# Altium PCB EMG_MainBoard_Layout.PcbDoc (part 6 of 6)
Units mm, origin at the board's own origin, x right, y up, seen from the top; angles counter-clockwise.
Board outline 75 x 40 mm, 4 copper layers (L1 TOP, L2 GND, L3 POWER SIGNAL, L4 BOTTOM GND), stack 1.164 mm thick; 231 components, 136 nets, 808 pads, 80 vias.
Unrouted connection lines stored in the file: 570.
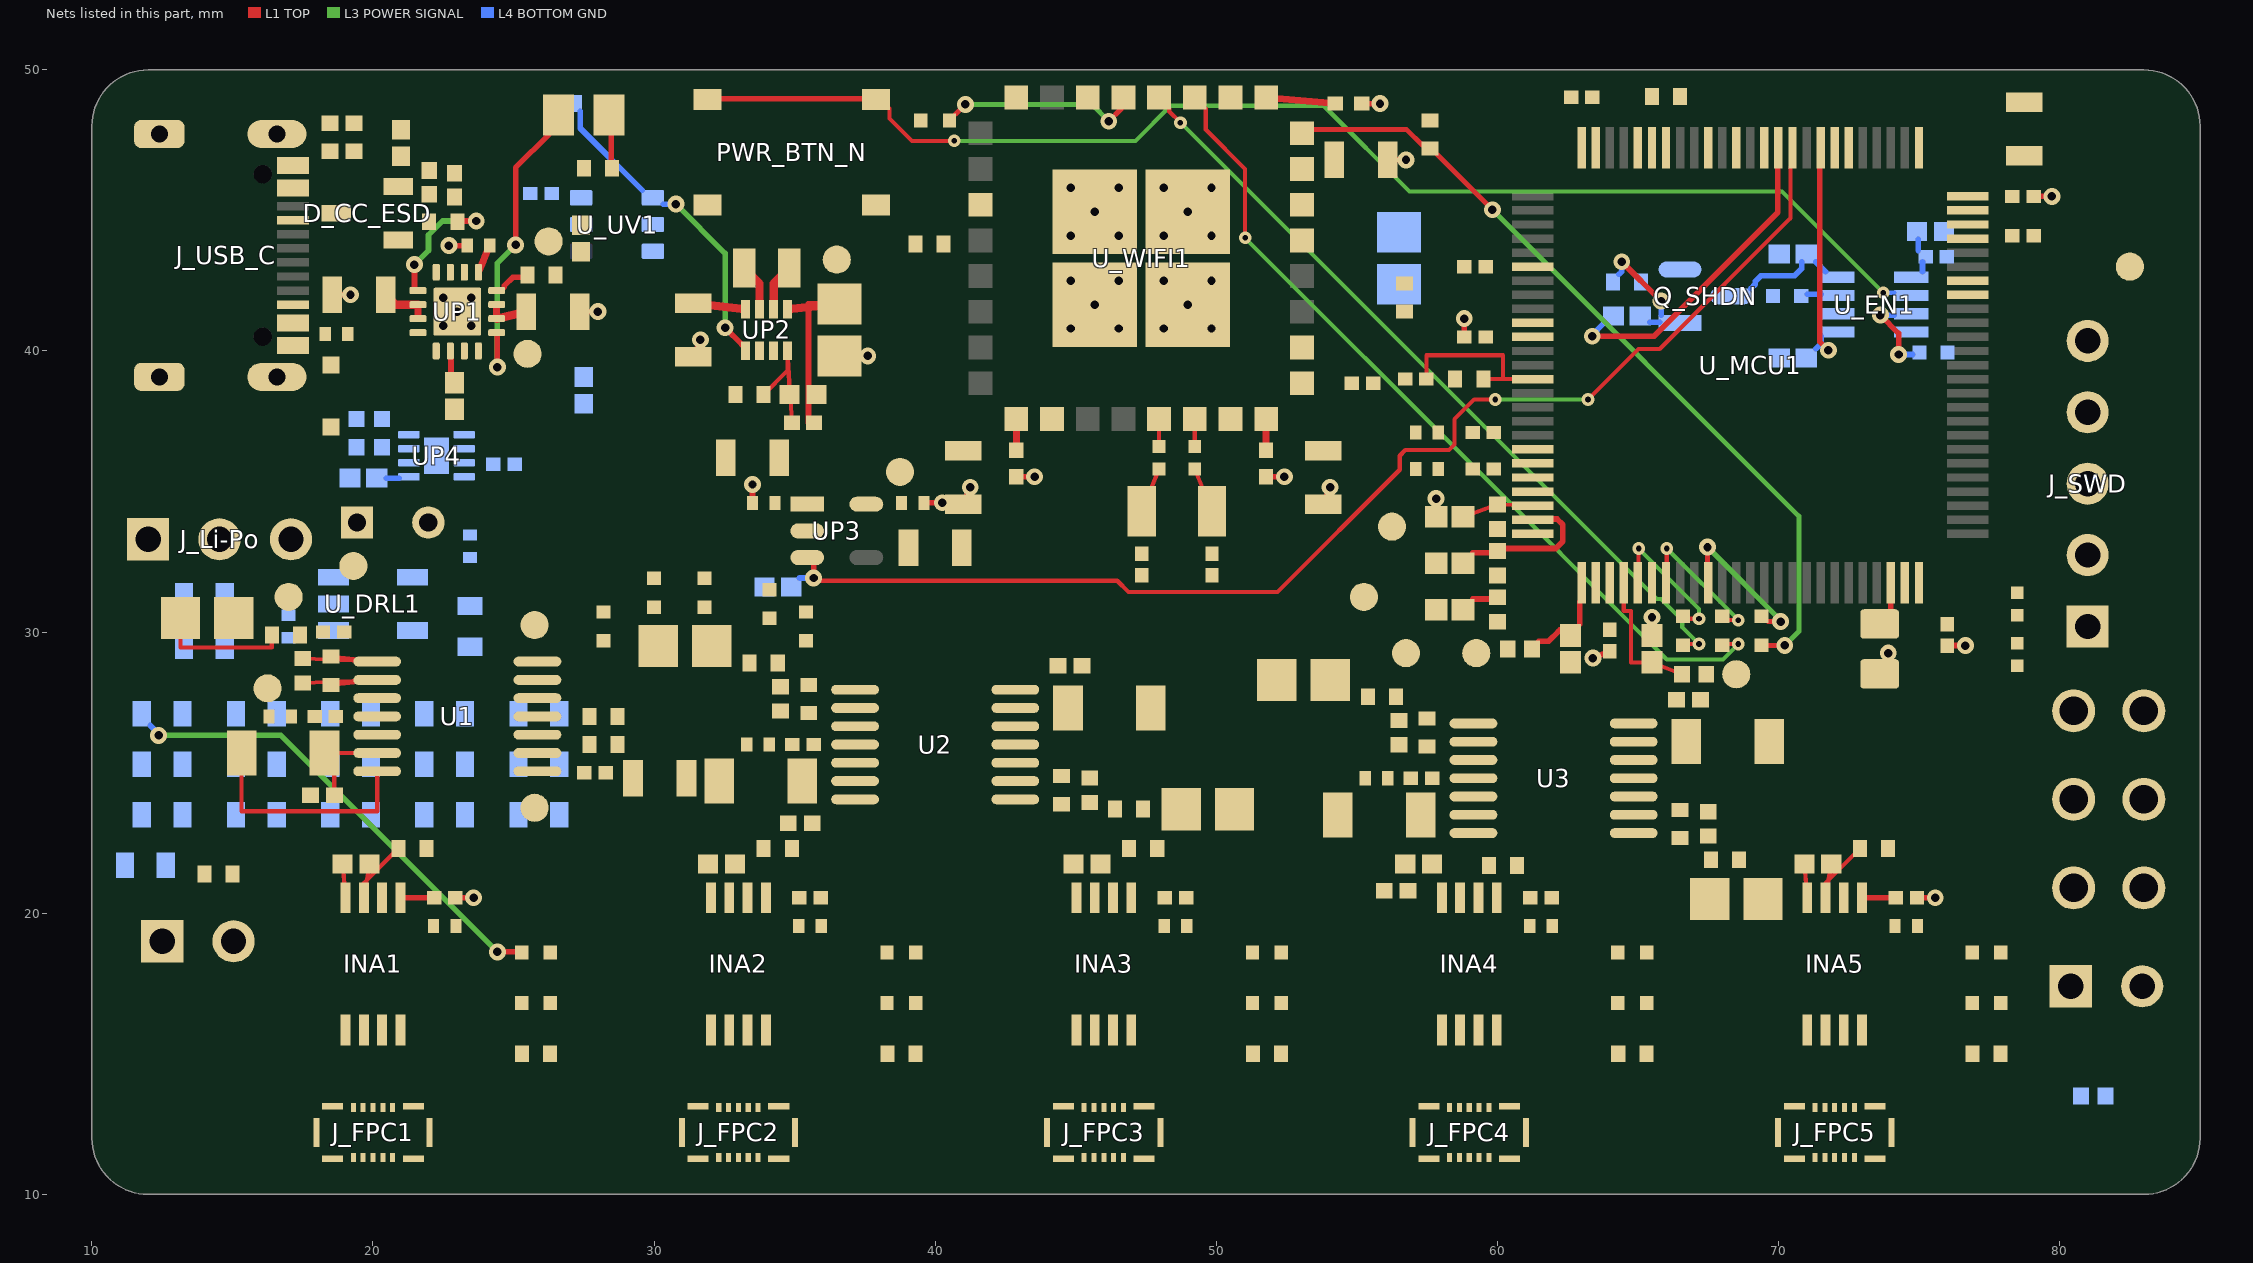
[diagram p5: the nets of this part, all layers, seen from the top]

## Via types
v1: diameter 0.6, hole 0.3, L1 TOP to L4 BOTTOM GND, 52 vias
v2: diameter 0.45, hole 0.2, L1 TOP to L4 BOTTOM GND, 12 vias
v3: diameter 0.6, hole 0.3, L1 TOP to L4 BOTTOM GND, tented top, 11 vias
v4: diameter 0.5, hole 0.3, L1 TOP to L4 BOTTOM GND, 5 vias

## Nets (pads, with @x,y where several pads share a name; then routed paths per layer and width w, separated by ;. In a path a pad name is that pad's centre, name@x,y a point inside that pad or via, vN(x,y) a via of type N, cw(c..) or ccw(c..) an arc to the next point about the centre after c; other vN are vias at no path point) (continued)
NetQ_SHDN_1: Q_SHDN.1 R_SHDN_G.1 R_SHDN_PD.2 | length 3.3
  L1 TOP w0.2: v1(64.425,43.175) v1(65.825,41.775)
  L4 BOTTOM GND w0.2: R_SHDN_PD.2@64.325,42.725 64.425,42.825 v1(64.425,43.175) ; R_SHDN_G.1@65.425,41.025 Q_SHDN.1@65.775,41.025 ; Q_SHDN.1@65.825,41.275 v1(65.825,41.775)
NetR_EN1_BIAS_2: R_EN1_BIAS.2 UP1.6 | length 0.5
  L1 TOP w0.2: R_EN1_BIAS.2@22.775,39.225 UP1.6@22.775,39.725
NetR_LIM_2: R_LIM.2 UP1.12 | length 0.8
  L1 TOP w0.2: 24.675,42.275 24.675,42.325 24.975,42.625 R_LIM.2@25.275,42.625
NetR_TMR_2: R_TMR.2 UP1.14
NetRISET_1: RISET.1 UP1.16
SYS_EN: R_EN.2 U_EN1.6 U_UV1.1 UP2.5 | length 10.1
  L1 TOP w0.2: v1(32.525,40.825) UP2.5@33.125,40.225
  L3 POWER SIGNAL w0.2: v1(30.775,45.225) 32.525,43.475 32.525,42.815 v1(32.525,40.825)
  L4 BOTTOM GND w0.2: R_EN.2@27.375,48.525 27.375,47.925 29.575,45.725 ; U_UV1.1@30.325,45.225 v1(30.775,45.225)
TS: R_TS_SER.2 UP1.1 | length 4.4
  L1 TOP w0.2: UP1.1@21.475,42.275 v1(21.475,43.075) ; R_TS_SER.2@23.225,44.625 v1(23.675,44.625)
  L3 POWER SIGNAL w0.2: v1(21.475,43.075) 21.975,43.575 21.975,44.1 21.975,44.125 22.475,44.625 v1(23.675,44.625)
USB_PGOOD_N: R_PGOOD.1 U_MCU1.82 UP1.7
Va_1: J_FPC1.2 R_DRL_VA1.1 RDD1.1
Va_2: J_FPC2.2 R_DRL_VA2.1 RDD4.1
Va_3: J_FPC3.2 R_DRL_VA3.1 RDD7.1
Va_4: J_FPC4.2 R_DRL_VA4.1 RDD10.1
Va_5: J_FPC5.2 R_DRL_VA5.1 RDD13.1
Vb_1: J_FPC1.4 R_DRL_VB1.1 RDD2.1
Vb_2: J_FPC2.4 R_DRL_VB2.1 RDD5.1
Vb_3: J_FPC3.4 R_DRL_VB3.1 RDD8.1
Vb_4: J_FPC4.4 R_DRL_VB4.1 RDD11.1
Vb_5: J_FPC5.4 R_DRL_VB5.1 RDD14.1
VBAT_CELL: C_BAT.1 CU6_1.2 J_Li-Po.3 pad.TP_VBAT_CELL UP1.2 UP1.3 UP4.2 UP4.3 | length 1.8
  L1 TOP w0.25: UP1.3@21.6,41.15 UP1.2@21.6,41.65
  L1 TOP w0.3: C_BAT.1@20.45,42 20.8,41.65 UP1.2@21.6,41.65
VBUS: C_IN_.1 C_VBUS.2 D_VBUS.1 J_USB_C.A4_B9 J_USB_C.B4_A9 pad.TP_VBUS R_TS_TOP.2 UP1.13 | length 1
  L1 TOP w0.25: UP1.13@23.75,42.8 23.883,43.117 24.017,43.433 C_IN_.1@24.15,43.75
Vc_1: J_FPC1.6 R_DRL_VC1.1 RDD3.1 | length 16.4
  L1 TOP w0.2: v1(24.425,18.625) RDD3.1@25.075,18.625
  L3 POWER SIGNAL w0.2: v1(12.375,26.325) 16.725,26.325 v1(24.425,18.625)
  L4 BOTTOM GND w0.2: R_DRL_VC1.1@12.075,26.675 12.375,26.375 v1(12.375,26.325)
Vc_2: J_FPC2.6 R_DRL_VC2.1 RDD6.1
Vc_3: J_FPC3.6 R_DRL_VC3.1 RDD9.1
Vc_4: J_FPC4.6 R_DRL_VC4.1 RDD12.1
Vc_5: J_FPC5.6 R_DRL_VC5.1 RDD15.1
VDiv: Cdiv_1.2 Cdiv_10uF.2 RV1.1 RV2.2 U1.10 U1.12
VOUT_1: CH_1.1 pad.TP_VOUT_1 R_ADC1.1 RG_1.2 U1.1 | length 4.3
  L1 TOP w0.15: CH_1.1@17.5,29.057 U1.1@20.15,28.95 RG_1.2@18.5,29.125
VOUT_2: CH_2.1 pad.TP_VOUT_2 R_ADC2.1 RG_2.2 U2.1
VOUT_3: CH_3.1 pad.TP_VOUT_3 R_ADC3.1 RG_3.2 U2.8
VOUT_4: CH_4.1 pad.TP_VOUT_4 R_ADC4.1 RG_4.2 U3.1
VOUT_5: CH_5.1 pad.TP_VOUT_5 R_ADC5.1 RG_5.2 U3.8
VREF_A: pad.TP_VREF_A RL_1.2 RL_2.2 RL_3.2 RL_4.2 RL_5.2 U1.3 U1.5 U1.8 U1.9 U2.3 U2.5 U2.10 U2.12 U3.3 U3.5 U3.10 U3.12
VREF_B_SRC: pad.TP_VREF_B_SRC R_ref.2 R_VREF1.1 R_VREF2.1 R_VREF3.1 R_VREF4.1 R_VREF5.1 U1.13 U1.14 U_DRL1.3
Vservo_1: Cservo_1.2 INA1.6 U1.7 | length 8.3
  L1 TOP w0.15: Cservo_1.2@15.325,25.7 15.325,23.625 20.15,23.625 U1.7@20.15,25.05
Vservo_2: Cservo_2.2 INA2.6 U2.7
Vservo_3: Cservo_3.2 INA3.6 U2.14
Vservo_4: Cservo_4.2 INA4.6 U3.7
Vservo_5: Cservo_5.2 INA5.6 U3.14
VSYS: C_OUT_.1 C_UV_BYPASS.1 CUP4_1.1 pad.TP_VSYS R_CHG_LED.1 R_EN1_1.1 R_EN1_BIAS.1 R_EN.1 U_UV1.3 U_UV1.5 U_UV1.6 UP1.10 UP1.11 UP2.4 | length 3.4
  L1 TOP w0.25: UP1.10@24.4,41.15 UP1.11@24.4,41.65
  L1 TOP w0.3: UP1.10@24.4,41.15 C_OUT_.1@25.45,41.4 ; CUP4_1.1@31.4,41.7 UP2.4@33.25,41.485
WIFI_BOOT: JP_WIFI_BOOT.2 R_WIFI_BOOT_PD.2 TP_WIFI_BOOT.TP U_MCU1.91 U_WIFI1.3
WIFI_CHIP_EN: C_WIFI_EN.1 R_WIFI_EN_PD.1 TP_WIFI_CHIP_EN.TP U_MCU1.87 U_WIFI1.17
WIFI_SPI_CLK: R_SPI_SCK.1 U_WIFI1.28 | length 27.3
  L1 TOP w0.15: U_WIFI1.28@48.325,48.625 48.325,48.525 v2(48.725,48.125) ; R_SPI_SCK.1@66.825,29.575 v2(67.175,29.575)
  L3 POWER SIGNAL w0.15: v2(48.725,48.125) 59.525,37.326 65.675,31.175 65.825,31.175 66.575,30.425 66.575,30.175 66.726,30.024 v2(67.175,29.575)
WIFI_SPI_CS: R_SPI_CS.1 R_WIFI_CS_PD.1 U_WIFI1.24 | length 27.7
  L1 TOP w0.18: U_WIFI1.24@53.425,47.875 56.775,47.875 R_WIFI_CS_PD.1@57.325,47.325 ; R_WIFI_CS_PD.1@57.875,46.975 59.525,45.325 v1(59.825,45.025) ; R_SPI_CS.1@69.625,29.525 v1(70.225,29.525)
  L3 POWER SIGNAL w0.18: v1(59.825,45.025) 70.725,34.125 70.725,30.025 ; v1(70.225,29.525) 70.724,30.024
WIFI_SPI_MISO: R_SPI_MISO.1 U_WIFI1.29 | length 6.5
  L1 TOP w0.18: R_SPI_MISO.1@40.725,48.425 v1(41.075,48.775) ; v1(46.175,48.175) U_WIFI1.29@46.625,48.625
  L3 POWER SIGNAL w0.18: v1(41.075,48.775) 45.575,48.775 v1(46.175,48.175)
WIFI_SPI_MOSI: R_SPI_MOSI.1 U_WIFI1.27 | length 29.5
  L1 TOP w0.15: U_WIFI1.27@49.625,48.625 49.625,47.875 51.025,46.475 v2(51.025,44.025) ; R_SPI_MOSI.1@68.225,29.575 v2(68.575,29.575)
  L3 POWER SIGNAL w0.15: v2(51.025,44.025) 59.525,35.525 65.026,30.024 66.025,29.025 68.025,29.025 v2(68.575,29.575)
WIFI_SPI_RDY: U_MCU1.89 U_WIFI1.21
WIFI_UART_RX: R_WIFI_UART_TX_LINK.1 TP_WIFI_UART_RX.TP U_WIFI1.23
WIFI_UART_TX: R_WIFI_UART_RX_LINK.1 TP_WIFI_UART_TX.TP U_WIFI1.22
WIFI_X32_RAW_IN: R_WIFI_X32_IN.2 U_WIFI1.14 | length 1
  L1 TOP w0.15: R_WIFI_X32_IN.2@49.235,36.6 U_WIFI1.14@49.235,37.584
WIFI_X32_RAW_OUT: R_WIFI_X32_OUT.2 U_WIFI1.13 | length 1
  L1 TOP w0.15: R_WIFI_X32_OUT.2@47.965,36.6 U_WIFI1.13@47.965,37.584
pads on no net: J_USB_C. J_USB_C.A6 J_USB_C.A7 J_USB_C.A8 J_USB_C.B6 J_USB_C.B7 J_USB_C.B8 U_MCU1.1 U_MCU1.2 U_MCU1.3 U_MCU1.4 U_MCU1.5 U_MCU1.7 U_MCU1.8 U_MCU1.9 U_MCU1.12 U_MCU1.13 U_MCU1.15 U_MCU1.16 U_MCU1.17 U_MCU1.18 U_MCU1.33 U_MCU1.34 U_MCU1.36 U_MCU1.37 U_MCU1.38 U_MCU1.39 U_MCU1.40 U_MCU1.41 U_MCU1.42 U_MCU1.43 U_MCU1.44 U_MCU1.45 U_MCU1.46 U_MCU1.47 U_MCU1.51 U_MCU1.52 U_MCU1.53 U_MCU1.54 U_MCU1.55 U_MCU1.56 U_MCU1.57 U_MCU1.58 U_MCU1.59 U_MCU1.60 U_MCU1.61 U_MCU1.62 U_MCU1.63 U_MCU1.64 U_MCU1.65 U_MCU1.66 U_MCU1.67 U_MCU1.70 U_MCU1.71 U_MCU1.77 U_MCU1.78 U_MCU1.79 U_MCU1.80 U_MCU1.84 U_MCU1.88 U_MCU1.90 U_MCU1.92 U_MCU1.93 U_MCU1.97 U_MCU1.98 U_UV1.4 U_WIFI1.1 U_WIFI1.2 U_WIFI1.4 U_WIFI1.5 U_WIFI1.6 U_WIFI1.7 U_WIFI1.8 U_WIFI1.11 U_WIFI1.12 U_WIFI1.19 U_WIFI1.20 U_WIFI1.31 UP1.17@23,41.4 UP3.4

## Polygon pours and split planes (outlines as drawn)
GND on L2 GND "EMG_L2_COMMON_GND" (solid, remove dead copper, pour order 0): 10.5,10.5 84.5,10.5 84.5,49.5 10.5,49.5
GND on L4 BOTTOM GND "EMG_L4_COMMON_GND" (solid, remove dead copper, pour order 1): 10.5,10.5 84.5,10.5 84.5,49.5 10.5,49.5

## Keep-outs
Keep-Out Layer:
  region: 41.19,49.44 53.47,49.44 53.47,54.44 41.19,54.44

## Silkscreen, mask and mechanical layers (free items; w line width, h text height)
Mechanical 4:
  lines w0.08: 19.3,13.087 19.3,14.2 ; 20,6 20,11.1 ; 32.3,13.087 32.3,14.2 ; 33,6 33,11.1 ; 45.3,13.087 45.3,14.2 ; 46,6 46,11.1 ; 58.3,13.087 58.3,14.2 ; 59,6 59,11.1 ; 71.3,13.087 71.3,14.2 ; 72,6 72,11.1
  text "COMMON GND - NO AGND / DGND SPLIT" at 33,63 h0.65
  text "ANTENNA: NO COPPER / VIAS / METAL / BATTERY" at 32,61 h0.65
  text "REMOTE NTC: ONE 103AT-2 ON CELL; P1 GND / P2 BAT_TEMP" at 10,57 h0.65
  text "SWD 1 VTREF / 2 IO / 3 GND / 4 CLK / 5 NRST" at 92,42 h0.65
  text "SIG1" at 19.4,14.4 h0.65
  text "SIG1" at 32.4,14.4 h0.65
  text "SIG1" at 45.4,14.4 h0.65
  text "SIG1" at 58.4,14.4 h0.65
  text "SIG1" at 71.4,14.4 h0.65
  text "CH1 / MAIN END" at 19,8 h0.65
  text "CH2 / MAIN END" at 32,8 h0.65
  text "CH3 / MAIN END" at 45,8 h0.65
  text "CH4 / MAIN END" at 58,8 h0.65
  text "CH5 / MAIN END" at 71,8 h0.65
  text "FLEX FOLD / KEYING / TOOL ENVELOPES TBD - DO NOT REVERSE" at 14,4 h0.65
  text "TRIAL 80 x 45 mm / R2 - NOT FABRICATION RELEASE" at 31,2 h0.65
Top Assembly:
  lines w0.08: 10.633,30.5 14.1,30.5 ; 11.059,17.463 18.2,24.2 ; 11.659,24.642 26,42.7 ; 11.905,48.862 18.9,47.1 ; 12,33.3 13.008,30.959 ; 12.259,17.271 33.8,24.7 ; 12.633,29.216 16.9,29.9 ; 12.659,46 22,46 ; 12.759,24.396 19.5,42 ; 14.059,44.9 19.8,44.9 ; 14.263,23.959 16.8,25.7 ; 15.021,34.259 18.5,38.4 ; 15.25,17.333 20,18.2 ; 15.371,11.659 35.2,23.2 ; 16.205,45.342 21,47.4 ; 17.099,36.35 18.6,30 ; 17.471,38.259 22.5,44.6 ; 17.5,28.625 17.5,32.867 ; 18.3,27 18.3,30.867 ; 18.5,28.625 21.737,34.541 ; 18.9,48.1 30.095,48.1 ; 20.187,23.659 30.2,24.8 ; 20.43,44.779 28,46.5 ; 21.4,22.3 25.267,14.716 ; 22.9,38.4 26.641,38.4 ; 22.9,45.9 28.241,44.846 ; 23,27 24.384,34.55 ; 23.75,43.75 28.258,28.559 ; 24.059,29.338 28.2,30.2 ; 24.646,30.659 30,31.4 ; 24.659,24.963 31.4,40.75 ; 25.546,48.941 27.5,48.4 ; 25.796,48.211 34.9,47.07 ; 26.4,41.4 28.541,45.279 ; 28.2,19.25 28.2,26 ; 29.383,21.033 32.4,21.75 ; 31.1,29.5 33.429,39.441 ; 31.421,23.859 57.5,35.8 ; 31.8,31.4 38.741,28.246 ; 32.516,34.6 33.9,34.6 ; 33.4,38.45 51.804,15.709 ; 33.5,36.2 36.167,36.218 ; 33.9,28.9 44.104,29.441 ; 34,42.95 36.35,37.966 ; 35.3,26 37.567,22.999 ; 35.3,27.909 35.3,37.45 ; 35.3,38.45 45.241,18.846 ; 35.4,30.2 41.941,32.954 ; 35.5,27.625 39.241,23.071 ; 35.55,20.55 36.617,16.15 ; 35.783,37.15 36.5,33.6 ; 36.6,40.75 40.15,38.933 ; 38.259,44.712 40,48.2 ; 39.25,28.817 40,26 ; 39.659,42.812 39.8,43.8 ; 40,33 43.867,33 ; 41,35.5 42.341,39.775 ; 41.25,18.2 46,18.2 ; 42.885,36 44.641,36 ; 43.033,23.183 46.9,23.7 ; 43.683,28.867 44.5,24.375 ; 44.362,33.559 53.8,35.5 ; 44.8,28.8 66.229,41.941 ; 45.4,21.75 51.867,22.117 ; 45.5,24.375 47.767,28.617 ; 46.2,27.3 70.541,27.3 ; 47,45.8 59.341,45.029 ; 47.171,19.559 49.7,23.7 ; 47.271,18.159 47.4,22.3 ; 47.965,36.2 61.541,36.2 ; 48.55,20.55 48.817,16.95 ; 48.6,34.3 65.341,34.3 ; 49.235,36.2 62.741,36.2 ; 49.296,25.959 55.9,27.7 ; 51.033,24.917 55.7,24.8 ; 51.233,30.117 53.1,28.3 ; 51.775,36 51.775,38.541 ; 52.159,41.9 56.7,41.9 ; 53.933,29.317 57.2,21.75 ; 54.699,21.733 57.3,24.8 ; 54.7,48.8 56.892,46.459 ; 55.15,46.8 58.567,47.741 ; 55.2,38.855 57.97,39.121 ; 55.8,23.5 74.541,23.5 ; 56.121,38.859 59.2,43 ; 56.4,20.8 68.741,35.429 ; 56.5,26.425 57.841,19.471 ; 56.513,36.841 58.3,34.1 ; 56.959,30.129 57.5,26.425 ; 57.5,37.1 67.979,53.041 ; 57.6,47.7 61.638,40.759 ; 58.3,32.45 60.841,27.021 ; 59,39 72.279,50.541 ; 59.2,40.5 64.941,40.5 ; 59.5,35.8 73.041,27.721 ; 59.5,37.1 71.841,42.033 ; 60,30.8 83.941,18.321 ; 60,32.45 68.079,50.441 ; 60,34.1 77.941,35.887 ; 60.2,21.7 62.729,14.759 ; 60.359,19.471 66.5,23.175 ; 60.8,29.4 74.079,49.341 ; 61.55,20.55 63.717,12.15 ; 62,24.8 67.617,19.25 ; 62.6,27.121 62.6,29.4 ; 64,29.7 64.979,33.041 ; 65.5,29.4 71.641,29.4 ; 66.6,30.05 67.541,35.458 ; 66.8,27.6 71.941,35.429 ; 67,28.5 86.541,22.021 ; 67.5,23.175 70.841,19.471 ; 68,30.05 68,34.241 ; 68.2,26.1 80.941,27.129 ; 68.5,20.5 72.241,19.571 ; 69.4,30.05 70.741,35.383 ; 70.559,28.113 80.5,24.05 ; 71.4,21.75 76.741,21.75 ; 72,18.2 72,22.95 ; 73.4,22.3 73.941,18.571 ; 73.6,29.4 79.429,33.741 ; 74.55,19.55 77.25,19.283 ; 78.159,32.463 80.5,27.2 ; 78.7,44.1 78.7,48.241 ; 80.5,20.9 82.367,21.318 ; 82.459,23.162 83,27.2 ; 83,19.37 83,20.9

## Text inside footprints (layer, text, board x,y; h text height)
J_USB_C: Top 3D Body "PCB EDGE" at 9.9,38 h0.41 r270